# Altium PCB R100.230.060.001-00 Filtr3.PcbDoc
Units mm, origin at the board's own origin, x right, y up, seen from the top; angles counter-clockwise.
Board outline 136 x 161 mm, 2 copper layers (Top, Bottom), stack 2.14 mm thick; 10 components, 5 nets, 38 pads, 363 vias.
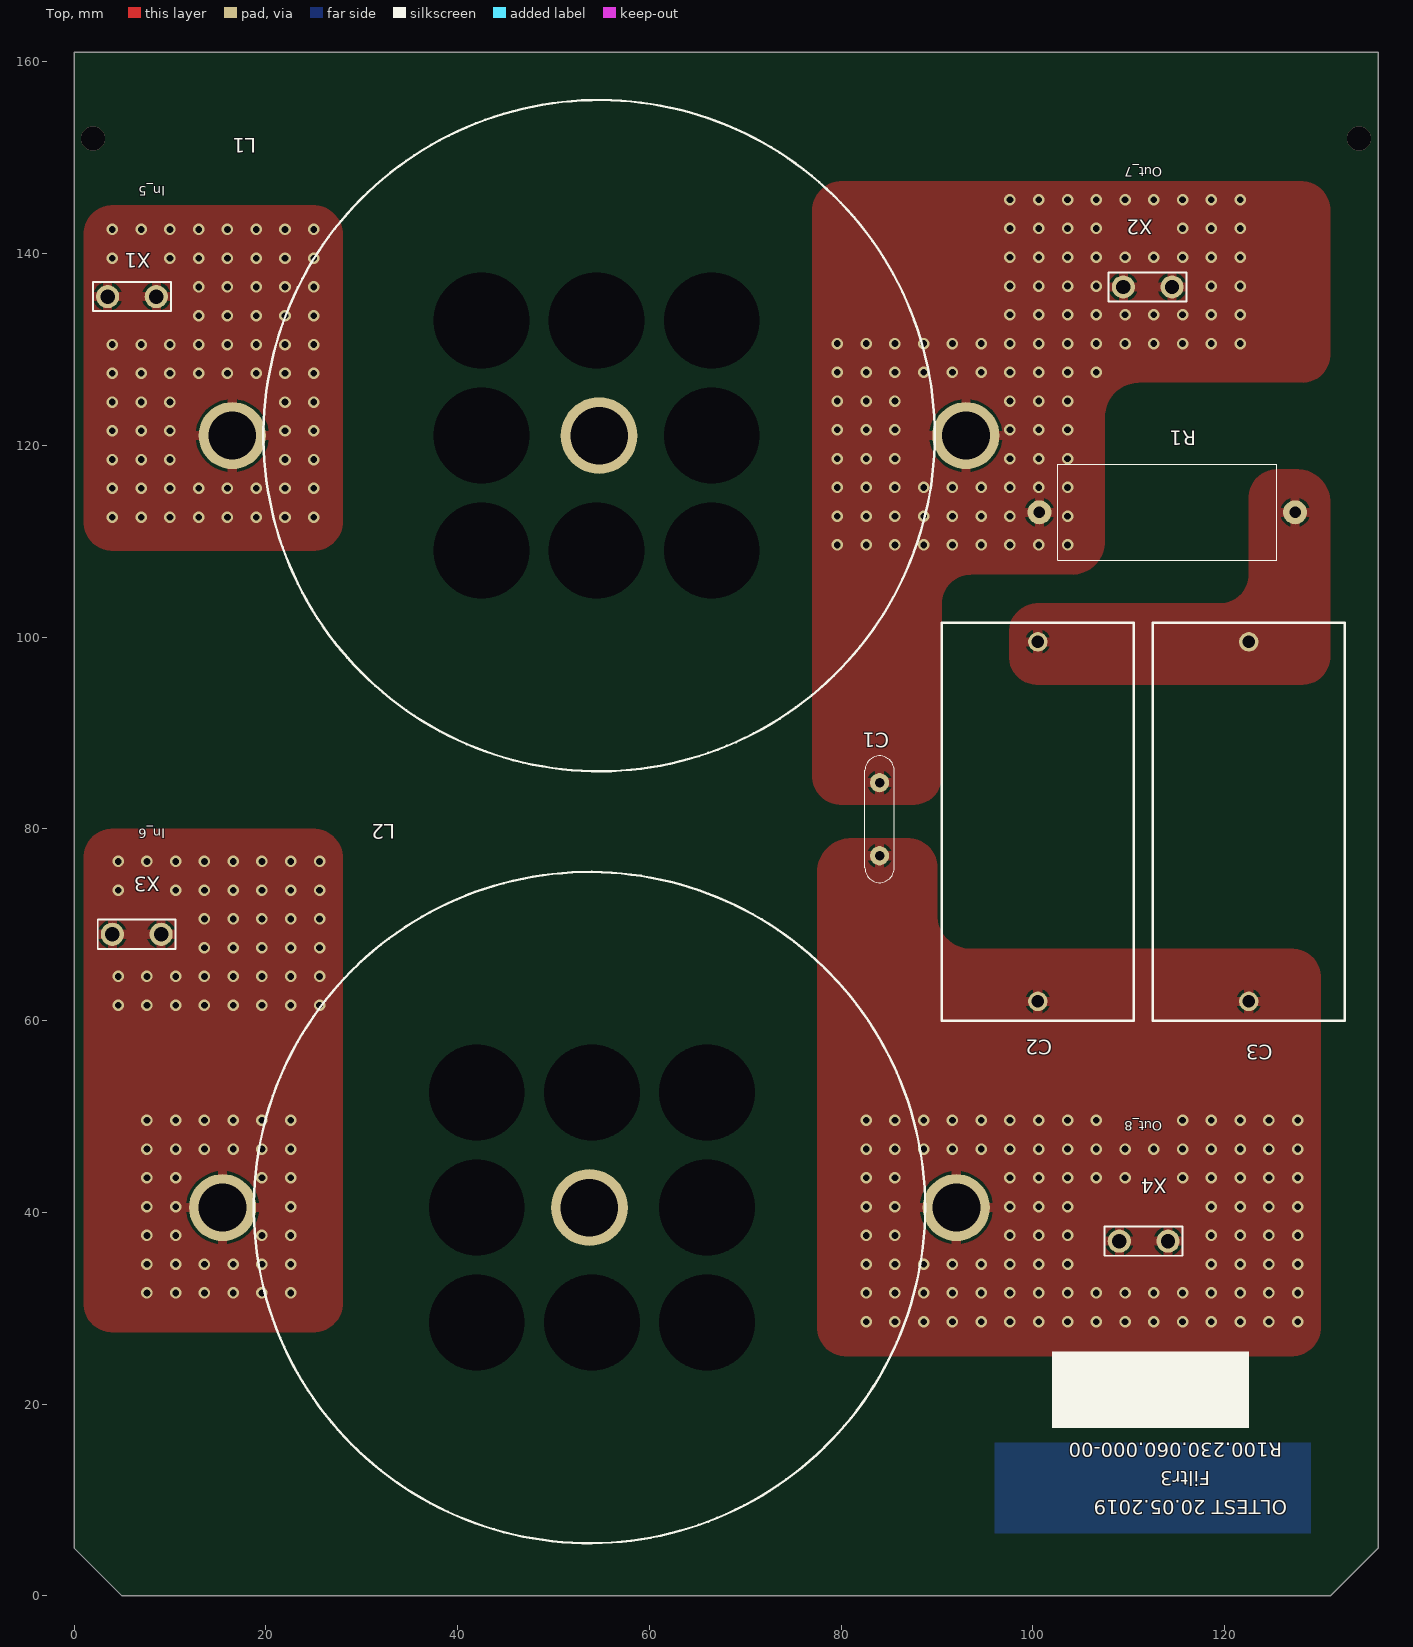
[diagram p0: Top view]
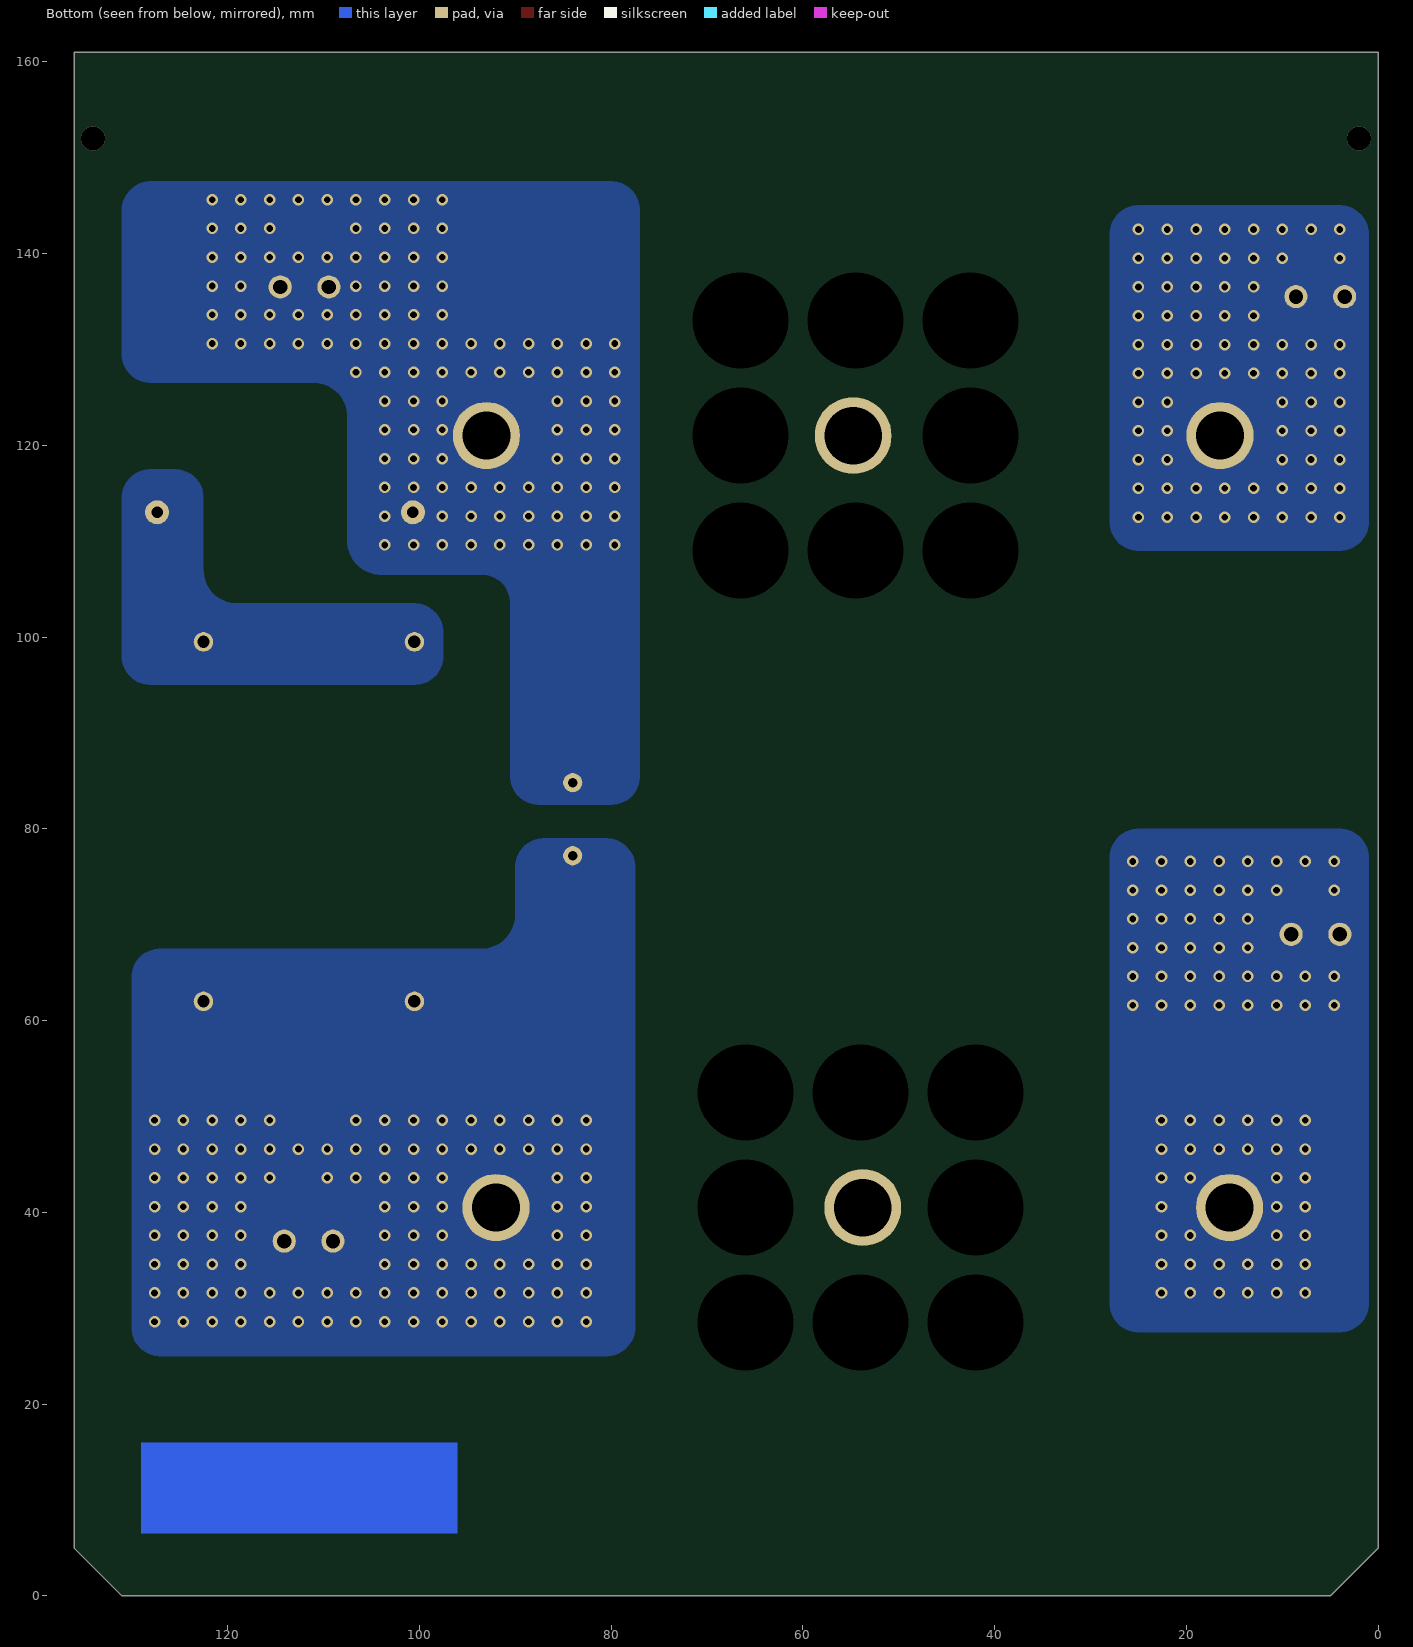
[diagram p1: Bottom view, seen from below]
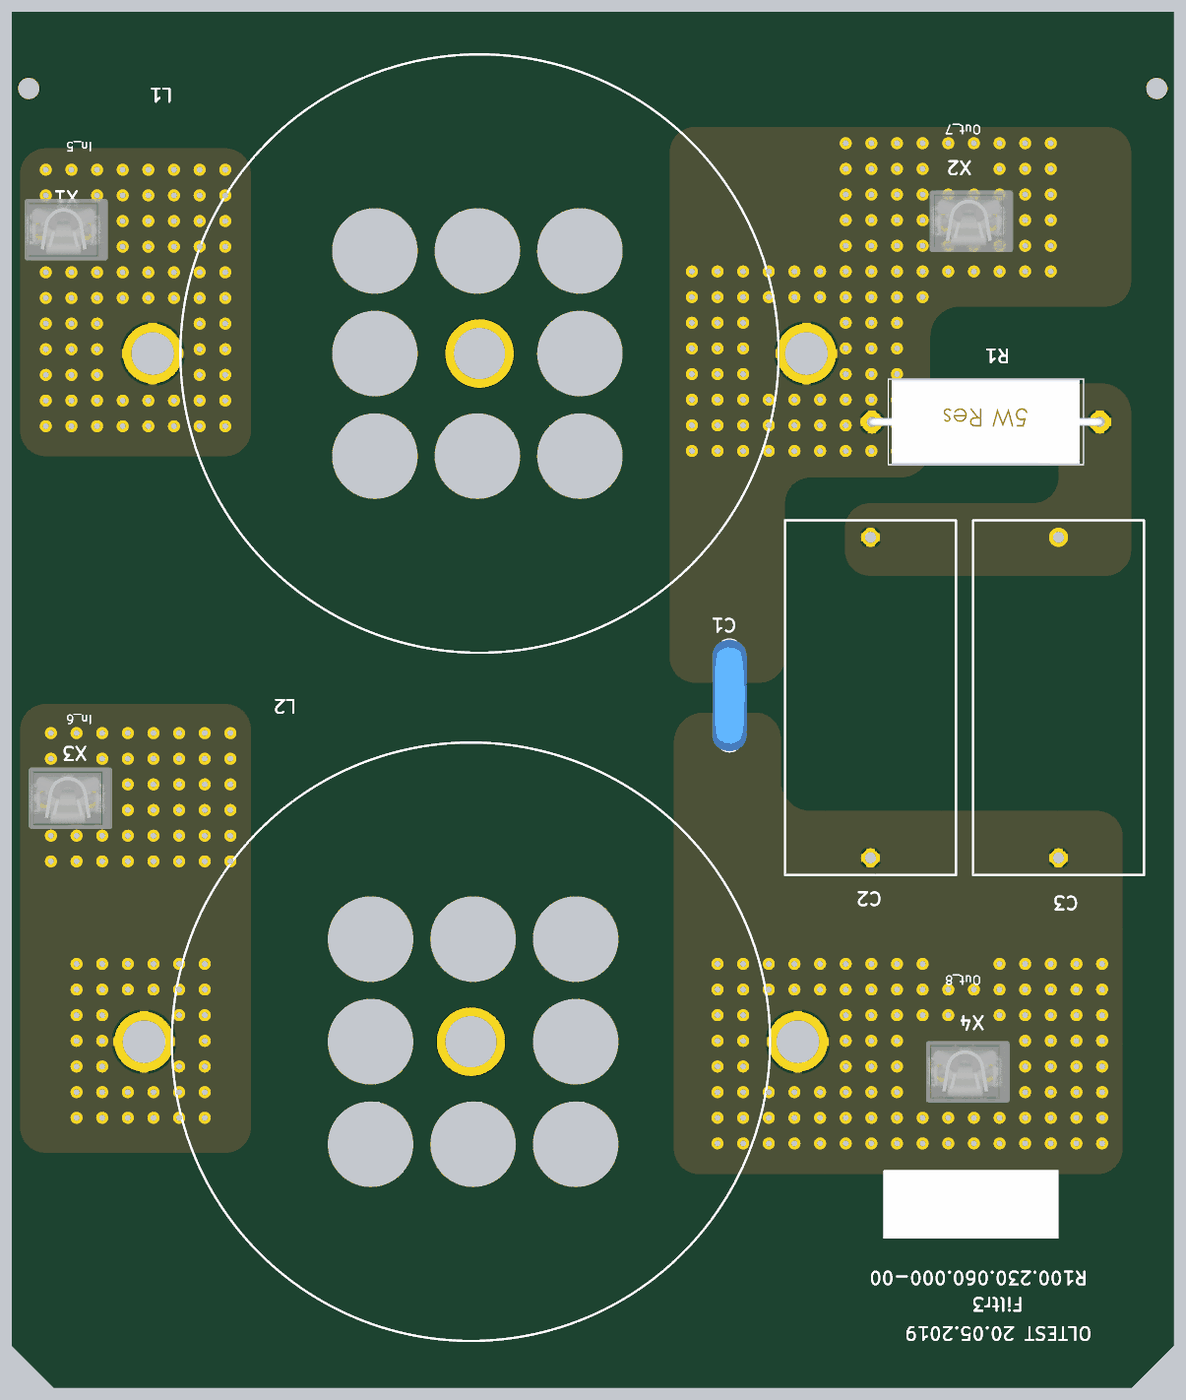
[diagram p2: 3D render of the assembled board from above, using the file's embedded part models]

## Layer stack, top to bottom
Top Solder: solder mask 0.0102, Solder Resist, Dk 3.5
Top: signal copper 0.07
Dielectric 1: dielectric 2, FR-4, Dk 4.8
Bottom: signal copper 0.07
Bottom Solder: solder mask 0.0102, Solder Resist, Dk 3.5

## Board outline
5,0 0,5 0,161 136,161 136,5 131,0

## Design rules (kind name [scope] priority, off if disabled: settings)
BoardOutlineClearance [All] p1: gap=0.5
Clearance Clearance_1 [(ObjectKind = 'Pad') And (Component = 'R10') And (Name = 'R10-2') vs InNet('VOUT-')] p1: gap=0.3
Clearance Clearance_Vout+- [InNet('VOUT+') or InNet('VOUT-')] p2: gap=1
Clearance Clearance_VOUT+-_4_+-Vin [InNet('VOUT+_4') or InNet('VOUT-_4') vs InNet('-VIN_200') or InNet('+VIN_200')] p3: gap=2
Clearance Clearance_VOUT+_4_VOUT-_4 [InNet('VOUT+_4') vs InNet('VOUT-_4')] p4: gap=2
Clearance Clearance_Vout_all [InNet('VOUT+_4') or InNet('VOUT-_4') or  InNet('VOUT+_3') or InNet('VOUT-_3') or InNet('VOUT+_2') or InNet('VOUT-_2') or InNet('VOUT+_1') or InNet('VOUT-_1') or InNet('VOUT+') or InNet('VOUT-')] p5: gap=1.2
Clearance Clearance_xp3_xp2_-Vin_200 [((ObjectKind = 'Pad') And (Component = 'XP3') And (Name = 'XP3-5')) or ((ObjectKind = 'Pad') And (Component = 'XP2') And (Name = 'XP2-5')) vs InNet('-VIN_200')] p6: gap=0.5
Clearance Clearance_+Vin_200_-Vin_200 [InNet('+VIN_200') vs InNet('-VIN_200')] p7: gap=2.2
Clearance Clearance_-Vin_200_All [InNet('-VIN_200') or InNet('+VIN_200')] p8: gap=1.2
Clearance [All] p9: gap=0.3 except(0.4: Arc-Poly Track-Poly SMDPad-Poly THPad-Poly Via-Poly Fill-Poly Poly-Poly)
ComponentClearance ComponentClearance_HS1 [(ObjectKind = 'Component') And (Name = 'HS1') or     (ObjectKind = 'Component') And (Name = 'HS2') or     (ObjectKind = 'Component') And (Name = 'HS3') or     (ObjectKind = 'Component') And (Name = 'HS4')] p1: gap=0.1 collisioncheckmode=3 verticalgap=0.1 showdistances=FALSE
ComponentClearance [All] p2: gap=0.254 collisioncheckmode=3 verticalgap=0.254 showdistances=FALSE
Height [All] p1: minheight=0 maxheight=63.5 prefheight=12.7
HoleSize [All] p1: absolutevalues=TRUE maxlimit=12 minlimit=0.025 maxpercent=80.000 minpercent=20.000
PolygonConnect PolygonConnect_shunt [(ObjectKind = 'Pad') And (Component = 'R10') And (Name = 'R10-1') or (ObjectKind = 'Pad') And (Component = 'R10') And (Name = 'R10-3')] p1: connectstyle=Direct reliefconductorwidth=0.254 reliefentries=4 polygonreliefangle="90 Angle" airgapwidth=0.254
PolygonConnect PolygonConnect_snnaber [((ObjectKind = 'Pad') And (Component = 'C3') And (Name = 'C3-2'))  or (ObjectKind = 'Poly') And (Net = 'NetC3_1')  or (ObjectKind = 'Pad') And (Component = 'R2') And (Name = 'R2-1')  or (ObjectKind = 'Pad') And (Component = 'VD2') And (Name = 'VD2-2')  or(ObjectKind = 'Pad') And (Component = 'C29') And (Name = 'C29-2') or (ObjectKind = 'Poly') And (Net = 'NetC29_1') or (ObjectKind = 'Pad') And (Component = 'VD6') And (Name = 'VD6-2') or (ObjectKind = 'Pad') And (Component = 'R8') And (Name = 'R8-1') or (ObjectKind = 'Poly') And (Net = 'N2') And (Name = 'Top Overlay-No Net')] p2: connectstyle=Direct reliefconductorwidth=0.254 reliefentries=4 polygonreliefangle="90 Angle" airgapwidth=0.254
PolygonConnect PolygonConnect_1 [IsStitchingVia] p3: connectstyle=Direct reliefconductorwidth=0.254 reliefentries=4 polygonreliefangle="90 Angle" airgapwidth=0.254
PolygonConnect PolygonConnect_bottom_fill [OnLayer('Bottom')] p4: connectstyle=Direct reliefconductorwidth=0.254 reliefentries=4 polygonreliefangle="90 Angle" airgapwidth=0.254
PolygonConnect PoligonConnect_top [OnLayer('Top')] p5: connectstyle=Relief reliefconductorwidth=1 reliefentries=4 polygonreliefangle="90 Angle" airgapwidth=0.3
RoutingVias [All] p1: holewidth=0.7 width=1.2 viastyle="Through Hole" minholewidth=0.5 minwidth=1 maxholewidth=12 maxwidth=15
SolderMaskExpansion [All] p1: expansion=0.102
Width Width_+Vin_200 [InNet('+VIN_200')] p1: maxlimit=50 minlimit=0.762 preferedwidth=10 checkconnectedcopper=TRUE
Width [InNet('No Net')] p2: maxlimit=0.254 minlimit=0.254 preferedwidth=0.254
27 further rules are at their usual default settings.

## Components (designator, comment, footprint, x,y, rotation, side; value= is the part's Value field where it differs from the comment)
C1 "10nF 300V" "C Y2 D13 7.5b" 84,81 r90 top
C2 "4.7uF 400VDC" MKP_W20_H39.5_L41.5_LS37.5 100.5,62 r90 top
C3 "4.7uF 400VDC" MKP_W20_H39.5_L41.5_LS37.5 122.5,62 r90 top
L1 "500/125uH 30A" "Dross (500/125 uH 30 A)AMAK.671111.034" 16.5,121 r0 top
L2 "500/125uH 30A" "Dross (500/125 uH 30 A)AMAK.671111.034" 92,40.5 r180 top
R1 "0.27" "PRW 5W 1050" 114,113 r180 top
X1 "63849-1" 63849-1+insulator(154719-1) 8.58,135.5 r180 top
X2 "63849-1" 63849-1+insulator(154719-1) 114.5,136.5 r180 top
X3 "63849-1" 63849-1+insulator(154719-1) 9.08,69 r180 top
X4 "63849-1" 63849-1+insulator(154719-1) 114.08,37 r180 top

## Footprints (in the part's own frame and the unit in brackets; to place one, negate y for a bottom-side part, rotate by r counter-clockwise, add the part's x,y. Pads: shape width x height; smd on the part's side, far side on the other; paste and mask are expansions set on the pad)
63849-1+insulator(154719-1) [mil]
  round 95 hole 59.06: 1(0,0) 2(200,0)
  silkscreen extent -60,-60 260,60, body extent -106,-141 279,142, height 955
"C Y2 D13 7.5b" [mm]
  round 2 hole 1: 1(-3.81,0) 2(3.81,0)
  silkscreen extent -6.6,-1.52 6.6,1.52, body extent -6.49,-2 6.49,2, height 15.5
"Dross (500/125 uH 30 A)AMAK.671111.034" [mm]
  round 0 hole 10: 0(26,-12) 0(26,0) 0(26,12) 0(38,-12) 0(38,12) 0(50,-12) 0(50,0) 0(50,12)
  round 7 hole 5: 1(0,0) 2(76.5,0)
  round 8 hole 6: 3(38.25,0)
  silkscreen extent 3.25,-35 73.25,35, body extent -2.67,-34.6 72.85,34.6, height 37
MKP_W20_H39.5_L41.5_LS37.5 [mil]
  round 80 hole 51.18: 1(0,0) 2(1476.38,0)
  silkscreen extent -79,-394 1555,394, body extent -84,-399 1560,399, height 1555
"PRW 5W 1050" [mm]
  round 2.5 hole 1.2: 1(-13.335,0) 2(13.335,0)
  silkscreen extent -11.43,-5 11.43,5, body extent -13.79,-5 13.78,5, height 10.01

## Part data
C1: library part "C X1Y2 10nF D13 LS7.5", "Ceramic D=14 LS=7.5 300VAC X1Y2"
C2 C3: library part "MKP1 4.7uF 10% 400VDC", "Polypropelene W20 H39.5 L41.5 LS37.5 400VDC 10%"
L1 L2: library part "Dross 500/125uH 30A 捞朗.671111.034", "500/125uH 30A  (Core T250-52 X1)"
R1: library part "PRW 0.27 5W +-5%", "蔓忸漤铋 PRW 5W 0R27 +-5%"
X1 X2 X3 X4: "PCB, 6.3õ0.8, hole"

## Via types
v1: diameter 1.2/1.2 (per signal layer), hole 0.7, Top to Bottom, 361 vias
v2: diameter 2.5, hole 2.5, Top to Bottom, 2 vias

## Nets (pads, with @x,y where several pads share a name; then routed paths per layer and width w, separated by ;. In a path a pad name is that pad's centre, name@x,y a point inside that pad or via, vN(x,y) a via of type N, cw(c..) or ccw(c..) an arc to the next point about the centre after c; other vN are vias at no path point)
N6: C2.2 C3.2 R1.1
NetC1_1: C1.1 C2.1 C3.1 L2.1 X4.1 X4.2
  other v1: 82.6,28.6 85.6,28.6 88.6,28.6 91.6,28.6 94.6,28.6 97.6,28.6 100.6,28.6 103.6,28.6 106.6,28.6 109.6,28.6 112.6,28.6 115.6,28.6 118.6,28.6 121.6,28.6 124.6,28.6 127.6,28.6 82.6,31.6 85.6,31.6 88.6,31.6 91.6,31.6 94.6,31.6 97.6,31.6 100.6,31.6 103.6,31.6 106.6,31.6 109.6,31.6 112.6,31.6 115.6,31.6 118.6,31.6 121.6,31.6 124.6,31.6 127.6,31.6 82.6,34.6 85.6,34.6 88.6,34.6 91.6,34.6 94.6,34.6 97.6,34.6 100.6,34.6 103.6,34.6 118.6,34.6 121.6,34.6 124.6,34.6 127.6,34.6 82.6,37.6 85.6,37.6 97.6,37.6 100.6,37.6 103.6,37.6 118.6,37.6 121.6,37.6 124.6,37.6 127.6,37.6 82.6,40.6 85.6,40.6 97.6,40.6 100.6,40.6 103.6,40.6 118.6,40.6 121.6,40.6 124.6,40.6 127.6,40.6 82.6,43.6 85.6,43.6 97.6,43.6 100.6,43.6 103.6,43.6 106.6,43.6 109.6,43.6 115.6,43.6 118.6,43.6 121.6,43.6 124.6,43.6 127.6,43.6 82.6,46.6 85.6,46.6 88.6,46.6 91.6,46.6 94.6,46.6 97.6,46.6 100.6,46.6 103.6,46.6 106.6,46.6 109.6,46.6 112.6,46.6 115.6,46.6 118.6,46.6 121.6,46.6 124.6,46.6 127.6,46.6 82.6,49.6 85.6,49.6 88.6,49.6 91.6,49.6 94.6,49.6 97.6,49.6 100.6,49.6 103.6,49.6 106.6,49.6 115.6,49.6 118.6,49.6 121.6,49.6 124.6,49.6 127.6,49.6
NetC1_2: C1.2 L1.2 R1.2 X2.1 X2.2
  other v1: 79.6,109.6 82.6,109.6 85.6,109.6 88.6,109.6 91.6,109.6 94.6,109.6 97.6,109.6 100.6,109.6 103.6,109.6 79.6,112.6 82.6,112.6 85.6,112.6 88.6,112.6 91.6,112.6 94.6,112.6 97.6,112.6 103.6,112.6 79.6,115.6 82.6,115.6 85.6,115.6 88.6,115.6 91.6,115.6 94.6,115.6 97.6,115.6 100.6,115.6 103.6,115.6 79.6,118.6 82.6,118.6 85.6,118.6 97.6,118.6 100.6,118.6 103.6,118.6 79.6,121.6 82.6,121.6 85.6,121.6 97.6,121.6 100.6,121.6 103.6,121.6 79.6,124.6 82.6,124.6 85.6,124.6 97.6,124.6 100.6,124.6 103.6,124.6 79.6,127.6 82.6,127.6 85.6,127.6 88.6,127.6 91.6,127.6 94.6,127.6 97.6,127.6 100.6,127.6 103.6,127.6 106.6,127.6 79.6,130.6 82.6,130.6 85.6,130.6 88.6,130.6 91.6,130.6 94.6,130.6 97.6,130.6 100.6,130.6 103.6,130.6 106.6,130.6 109.6,130.6 112.6,130.6 115.6,130.6 118.6,130.6 121.6,130.6 97.6,133.6 100.6,133.6 103.6,133.6 106.6,133.6 109.6,133.6 112.6,133.6 115.6,133.6 118.6,133.6 121.6,133.6 97.6,136.6 100.6,136.6 103.6,136.6 106.6,136.6 118.6,136.6 121.6,136.6 97.6,139.6 100.6,139.6 103.6,139.6 106.6,139.6 109.6,139.6 112.6,139.6 115.6,139.6 118.6,139.6 121.6,139.6 97.6,142.6 100.6,142.6 103.6,142.6 106.6,142.6 115.6,142.6 118.6,142.6 121.6,142.6 97.6,145.6 100.6,145.6 103.6,145.6 106.6,145.6 109.6,145.6 112.6,145.6 115.6,145.6 118.6,145.6 121.6,145.6
NetL1_1: L1.1 X1.1 X1.2
  other v1: 4,112.5 7,112.5 10,112.5 13,112.5 16,112.5 19,112.5 22,112.5 25,112.5 4,115.5 7,115.5 10,115.5 13,115.5 16,115.5 19,115.5 22,115.5 25,115.5 4,118.5 7,118.5 10,118.5 22,118.5 25,118.5 4,121.5 7,121.5 10,121.5 22,121.5 25,121.5 4,124.5 7,124.5 10,124.5 22,124.5 25,124.5 4,127.5 7,127.5 10,127.5 13,127.5 16,127.5 19,127.5 22,127.5 25,127.5 4,130.5 7,130.5 10,130.5 13,130.5 16,130.5 19,130.5 22,130.5 25,130.5 13,133.5 16,133.5 19,133.5 22,133.5 25,133.5 13,136.5 16,136.5 19,136.5 22,136.5 25,136.5 4,139.5 10,139.5 13,139.5 16,139.5 19,139.5 22,139.5 25,139.5 4,142.5 7,142.5 10,142.5 13,142.5 16,142.5 19,142.5 22,142.5 25,142.5
NetL2_2: L2.2 X3.1 X3.2
  other v1: 7.6,31.6 10.6,31.6 13.6,31.6 16.6,31.6 19.6,31.6 22.6,31.6 7.6,34.6 10.6,34.6 13.6,34.6 16.6,34.6 19.6,34.6 22.6,34.6 7.6,37.6 10.6,37.6 19.6,37.6 22.6,37.6 7.6,40.6 10.6,40.6 22.6,40.6 7.6,43.6 10.6,43.6 19.6,43.6 22.6,43.6 7.6,46.6 10.6,46.6 13.6,46.6 16.6,46.6 19.6,46.6 22.6,46.6 7.6,49.6 10.6,49.6 13.6,49.6 16.6,49.6 19.6,49.6 22.6,49.6 4.6,61.6 7.6,61.6 10.6,61.6 13.6,61.6 16.6,61.6 19.6,61.6 22.6,61.6 25.6,61.6 4.6,64.6 7.6,64.6 10.6,64.6 13.6,64.6 16.6,64.6 19.6,64.6 22.6,64.6 25.6,64.6 13.6,67.6 16.6,67.6 19.6,67.6 22.6,67.6 25.6,67.6 13.6,70.6 16.6,70.6 19.6,70.6 22.6,70.6 25.6,70.6 4.6,73.6 10.6,73.6 13.6,73.6 16.6,73.6 19.6,73.6 22.6,73.6 25.6,73.6 4.6,76.6 7.6,76.6 10.6,76.6 13.6,76.6 16.6,76.6 19.6,76.6 22.6,76.6 25.6,76.6
pads on no net: L1.0 L1.3 L2.0 L2.3
copper on no net:
  other v2: 2,152 134,152

## Polygon pours and split planes (outlines as drawn)
NetL2_2 on Top "NetL1_1" (solid, pour order 4): 1,77 1,30.5 ccw(c4,30.5) 4,27.5 25,27.5 ccw(c25,30.5) 28,30.5 28,77 ccw(c25,77) 25,80 4,80 ccw(c4,77)
NetC1_2 on Top "NetL1_1" (solid, pour order 8): 77,144.5 77,85.5 ccw(c80,85.5) 80,82.5 87.5,82.5 ccw(c87.5,85.5) 90.5,85.5 90.5,103.5 cw(c93.5,103.5) 93.5,106.5 104,106.5 ccw(c104,110) 107.5,110 107.5,123 cw(c111,123) 111,126.5 128,126.5 ccw(c128,129.5) 131,129.5 131,144.5 ccw(c128,144.5) 128,147.5 80,147.5 ccw(c80,144.5)
NetC1_1 on Top "NetL1_1" (solid, pour order 14): 77.5,75.5 77.5,28 ccw(c80.5,28) 80.5,25 127,25 ccw(c127,28) 130,28 130,64.5 ccw(c127,64.5) 127,67.5 93.5,67.5 cw(c93.5,71) 90,71 90,76 ccw(c87,76) 87,79 81,79 ccw(c81,75.5)
N6 on Top "NetL1_1" (solid, pour order 16): 97.5,100.5 97.5,98 ccw(c100.5,98) 100.5,95 128,95 ccw(c128,98) 131,98 131,114 ccw(c127.5,114) 127.5,117.5 125.5,117.5 ccw(c125.5,114.5) 122.5,114.5 122.5,106.5 cw(c119.5,106.5) 119.5,103.5 100.5,103.5 ccw(c100.5,100.5)
NetL1_1 on Top "NetL1_1" (solid, pour order 0): 1,142 1,112 ccw(c4,112) 4,109 25,109 ccw(c25,112) 28,112 28,142 ccw(c25,142) 25,145 4,145 ccw(c4,142)
NetL1_1 on Bottom "NetL1_1" (solid, pour order 2): 1,142 1,112 ccw(c4,112) 4,109 25,109 ccw(c25,112) 28,112 28,142 ccw(c25,142) 25,145 4,145 ccw(c4,142)
NetL2_2 on Bottom "NetL1_1" (solid, pour order 6): 1,77 1,30.5 ccw(c4,30.5) 4,27.5 25,27.5 ccw(c25,30.5) 28,30.5 28,77 ccw(c25,77) 25,80 4,80 ccw(c4,77)
NetC1_2 on Bottom "NetL1_1" (solid, pour order 10): 77,144.5 77,85.5 ccw(c80,85.5) 80,82.5 87.5,82.5 ccw(c87.5,85.5) 90.5,85.5 90.5,103.5 cw(c93.5,103.5) 93.5,106.5 104,106.5 ccw(c104,110) 107.5,110 107.5,123 cw(c111,123) 111,126.5 128,126.5 ccw(c128,129.5) 131,129.5 131,144.5 ccw(c128,144.5) 128,147.5 80,147.5 ccw(c80,144.5)
NetC1_1 on Bottom "NetL1_1" (solid, pour order 12): 80.5,79 87,79 cw(c87,76) 90,76 90,71 ccw(c93.5,71) 93.5,67.5 127,67.5 cw(c127,64.5) 130,64.5 130,28 cw(c127,28) 127,25 80.5,25 cw(c80.5,28) 77.5,28 77.5,76 cw(c80.5,76)
N6 on Bottom "NetL1_1" (solid, pour order 18): 97.5,100.5 97.5,98 ccw(c100.5,98) 100.5,95 128,95 ccw(c128,98) 131,98 131,114.5 ccw(c128,114.5) 128,117.5 125.5,117.5 ccw(c125.5,114.5) 122.5,114.5 122.5,107 cw(c119,107) 119,103.5 100.5,103.5 ccw(c100.5,100.5)

## Other copper
Bottom:
  rectangle: 96,6.5 129,16

## Silkscreen, mask and mechanical layers (free items; w line width, h text height)
Top Overlay:
  rectangle: 102,17.5 122.5,25.5
  text "Out_7" at 113.5,149 h1 r180
  text "In_5" at 9.5,147 h1 r180
  text "In_6" at 9.5,80 h1 r180
  text "Out_8" at 113.5,49.5 h1 r180
  text "R100.230.060.000-00" at 125.996,16 h1.5 r180
  text "Filtr3" at 118.5,13 h1.5 r180
  text "OLTEST 20.05.2019" at 126.5,10 h1.5 r180
Bottom Solder:
  text "R100.230.060.001-00" at 97.311,14.5 h1.5 r180
  text "Filtr3" at 100.5,11.5 h1.5 r180
Board:
  the board outline again, w0.254